# Altium PCB PCB1.PcbDoc
Units mm, origin at the board's own origin, x right, y up, seen from the top; angles counter-clockwise.
Board outline 140 x 75.1 mm, 2 copper layers (Top Layer, Bottom Layer); 104 components, 94 nets, 402 pads, 386 vias.
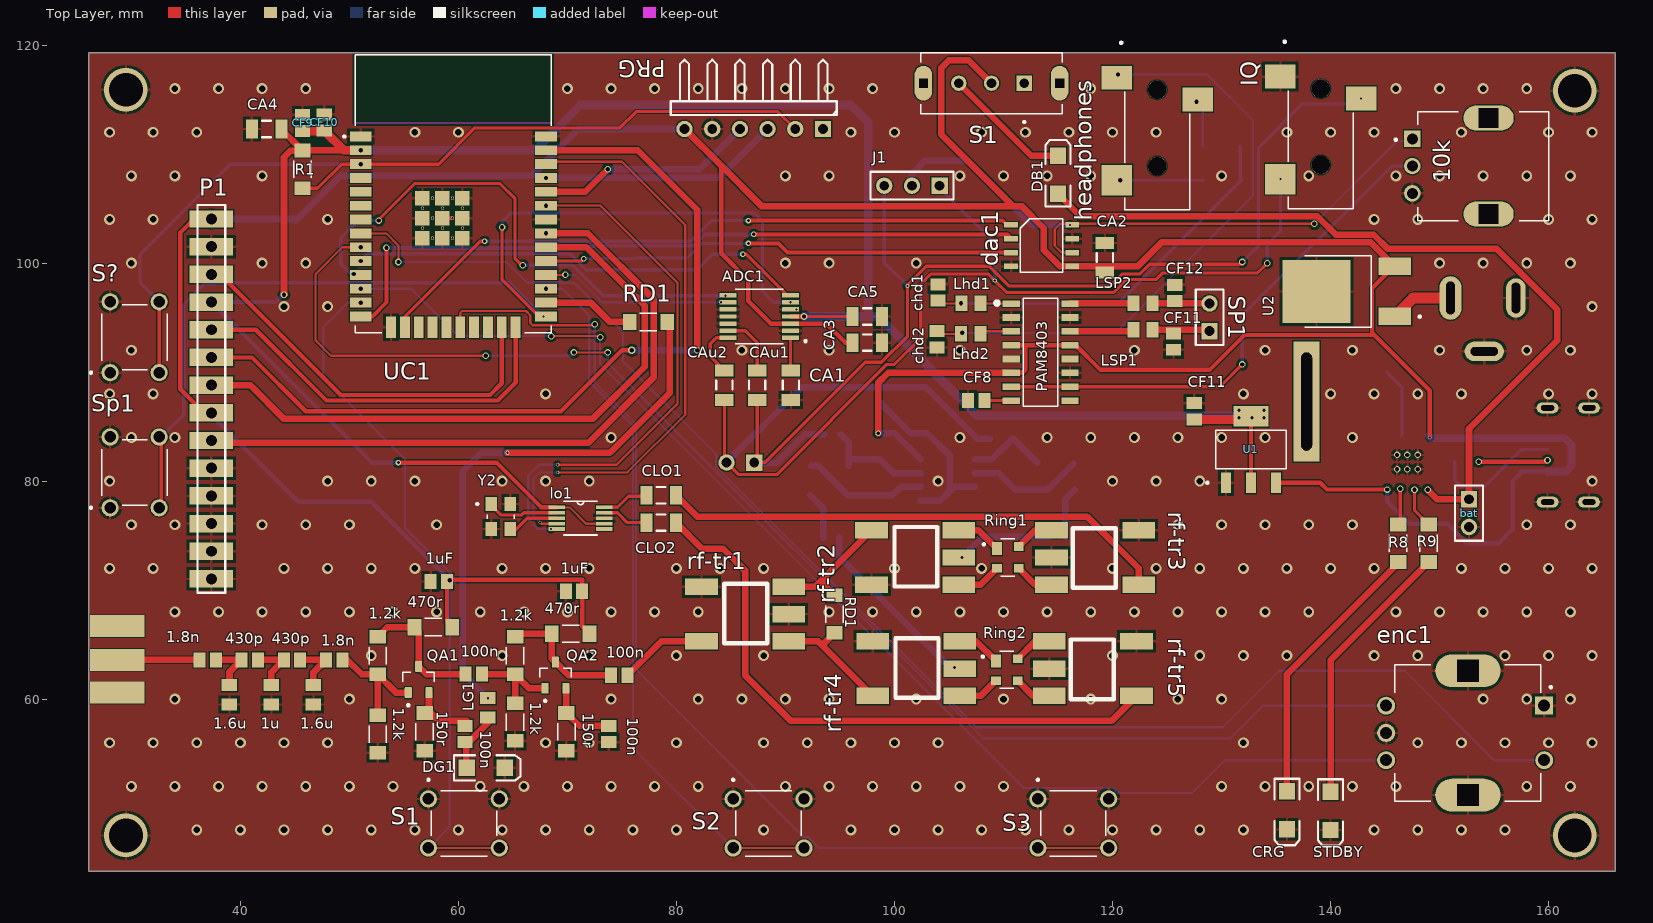
[diagram p0: Top Layer view]
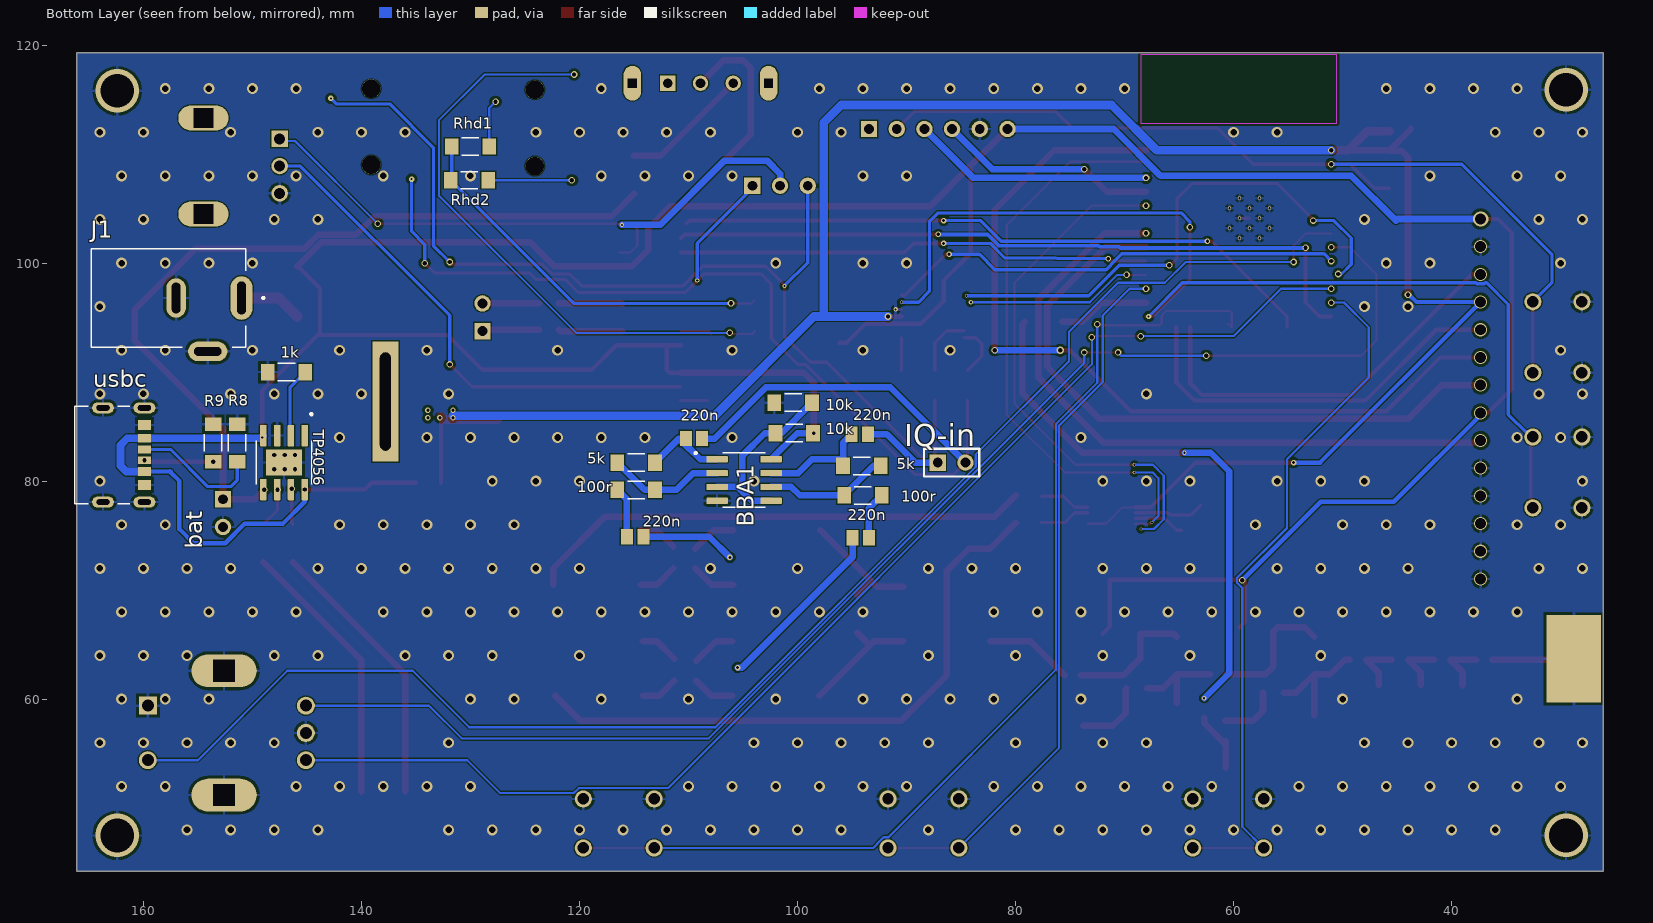
[diagram p1: Bottom Layer view, seen from below]
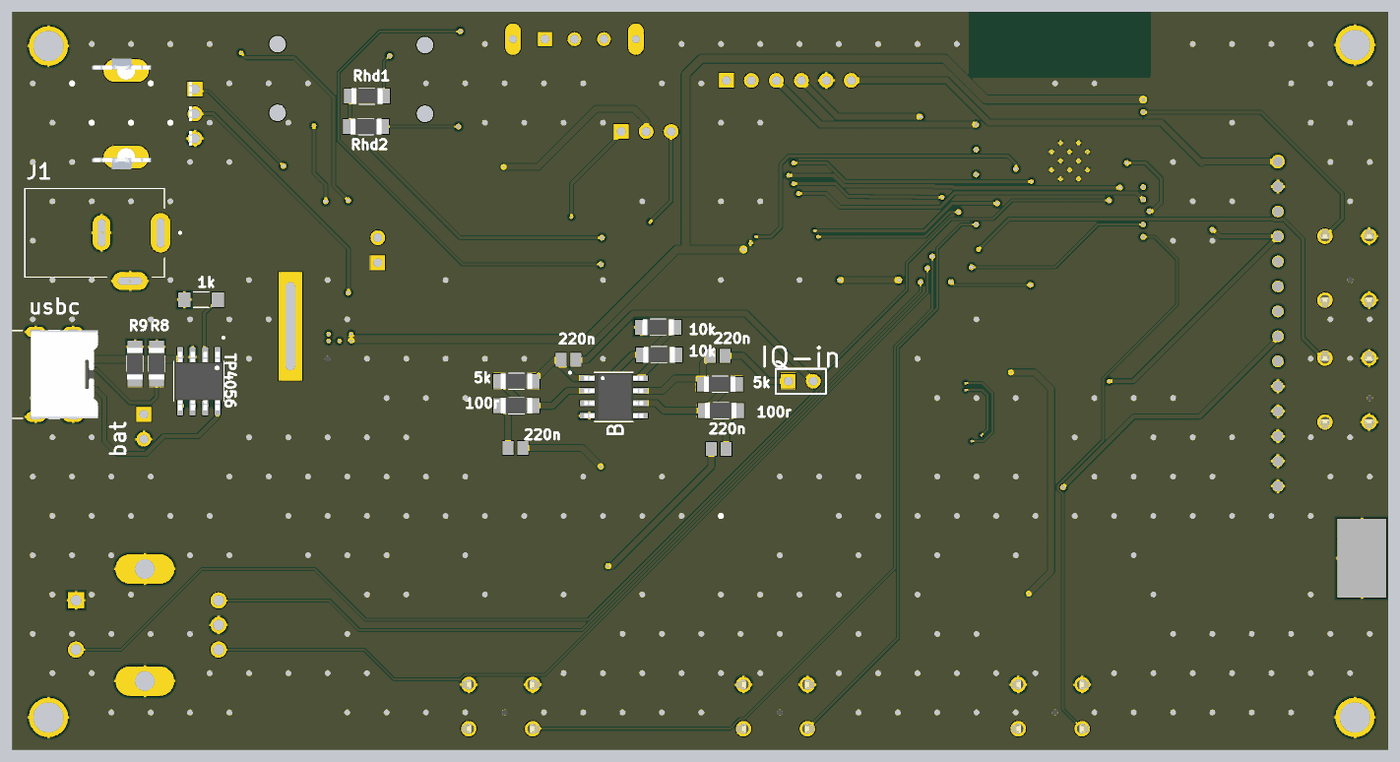
[diagram p2: 3D render of the assembled board from below, using the file's embedded part models]

## Layer stack, top to bottom
Top Solder: solder mask 0.0102, Solder Resist, Dk 3.5
Top Layer: signal copper 0.0356
Dielectric 1: dielectric 0.32, FR-4, Dk 4.8
Bottom Layer: signal copper 0.0356
Bottom Solder: solder mask 0.0102, Solder Resist, Dk 3.5

## Board outline
26.1,44.2 166.1,44.2 166.1,119.3 26.1,119.3

## Design rules (kind name [scope] priority, off if disabled: settings)
Clearance [All] p1: gap=0.1 ignorepadtopadclearanceinfootprint=TRUE except(0: Via-Hole Fill-Hole Poly-Hole Region-Hole Text-Hole; 0.254: Via-Via Via-Fill Via-Poly Via-Region Via-Text Fill-Fill Fill-Poly Fill-Region Fill-Text Poly-Poly Poly-Region Poly-Text Region-Region Region-Text Text-Text)
PolygonConnect [All] p1: connectstyle=Relief reliefconductorwidth=0.254 reliefentries=4 polygonreliefangle="90 Angle" airgapwidth=0.254
RoomDefinition front-end [InComponentClass('front-end')] p1: confinementstyle=ConfineIn formatcopy=TRUE lockcomponents=FALSE outline 25.9,44.1 166.1,44.1 166.1,119.4 25.9,119.4
RoomDefinition Sheet1 [InComponentClass('Sheet1')] p2: confinementstyle=ConfineIn formatcopy=TRUE lockcomponents=FALSE outline 26.1,44.2 165.9,44.2 165.9,119.5 26.1,119.5
RoutingVias [All] p1: holewidth=0.711 width=1.27 viastyle="Through Hole" minholewidth=0.2 minwidth=0.4 maxholewidth=0.711 maxwidth=1.27
SolderMaskExpansion [All] p1: expansion=0.102
Width [All] p1: maxlimit=3 minlimit=0.2 preferedwidth=0.7 minimp=50.000000 maximp=50.000000 favimp=50.000000
30 further rules are at their usual default settings.

## Classes and differential pairs
component class front-end: 1.2k 1.6u 1.8n 1u 1uF 5k 10k 100n 100r 150r 220n 430p 470r BBA1 CA? CBB1 CBB2 CBB3 CBB4 CF1 CF2 CF? DG1 LG1 QA1 QA2 R? RA5 RA6 RA7 RD1 rf-tr1 rf-tr2 rf-tr3 rf-tr4 rf-tr5 Ring1 Ring2
component class Sheet1: 1k 10k ADC1 bat CA1 CA2 CA3 CA4 CA5 CA8 CA9 CA10 CA11 CAu1 CAu2 CF8 CF9 CF10 CF11 CF12 chd1 chd2 CLO1 CLO2 CRG dac1 DB1 enc1 headphones IQ IQ-in J1 Lhd1 Lhd2 lo1 LSP1 LSP2 P1 PAM8403 PRG R1 R6 R8 R9 Rhd1 Rhd2 S1 S2 S3 S? SP1 Sp1 STDBY TP4056 U1 U2 UC1 usbc Y2

## Components (designator, comment, footprint, x,y, rotation, side; value= is the part's Value field where it differs from the comment)
1.2k "ERJU08J274V" RES_ERJU08J274V 65.2,64 r90 top
1.2k "ERJU08J274V" RES_ERJU08J274V 65.2,57.9 r90 top
1.2k "ERJU08J274V" RES_ERJU08J274V 52.6,56.8 r90 top
1.2k "ERJU08J274V" RES_ERJU08J274V 52.6,64 r90 top
1.6u "LQM21PN3R3MGRD" INDC2012X100N 46.7,60.4 r90 top
1.6u "LQM21PN3R3MGRD" INDC2012X100N 39,60.4 r90 top
1.8n "Cap Pol3" C0805 48.6,63.6 r0 top value=100pF
1.8n "Cap Pol3" C0805 37,63.6 r0 top value=100pF
1k "1K" RES_ERJU08J274V 146.875,90 r180 bottom
1u "LQM21PN3R3MGRD" INDC2012X100N 42.85,60.4 r90 top
1uF "Cap Pol3" C0805 70.6,69.9 r180 top value=100pF
1uF "Cap Pol3" C0805 58.2,70.8 r180 top value=100pF
5k "ERJU08J154V" RES_ERJU08J154V 94.1,81.4 r180 bottom
5k "ERJU08J154V" RES_ERJU08J154V 114.8,81.7 r180 bottom
10k "ERJU08J154V" RES_ERJU08J154V 100.4,87.2 r180 bottom
10k "ERJU08J154V" RES_ERJU08J154V 100.3,84.4 r180 bottom
10k "PT01-D120D-B104" TRIM_PT01-D120D-B104 154.5,108.9 r270 top
100n "Cap Pol3" C0805 60.6,56.8 r270 top value=100pF
100n "Cap Pol3" C0805 73.8,56.8 r270 top value=100pF
100n "Cap Pol3" C0805 74.75,62.2 r0 top value=100pF
100n "Cap Pol3" C0805 61.4,62.3 r0 top value=100pF
100r "ERJU08J154V" RES_ERJU08J154V 94,78.7 r180 bottom
100r "ERJU08J154V" RES_ERJU08J154V 114.8,79.2 r180 bottom
150r "ERJU08J274V" RES_ERJU08J274V 69.9,57 r90 top
150r "ERJU08J274V" RES_ERJU08J274V 56.9,57 r90 top
220n "Cap Pol3" C0805 109.5,83.9 r180 bottom value=100pF
220n "Cap Pol3" C0805 94.3,84.3 r180 bottom value=100pF
220n "Cap Pol3" C0805 94.2,74.8 r180 bottom value=100pF
220n "Cap Pol3" C0805 114.9,74.9 r0 bottom value=100pF
430p "Cap Pol3" C0805 44.733,63.6 r0 top value=100pF
430p "Cap Pol3" C0805 40.866,63.6 r0 top value=100pF
470r "ERJU08J274V" RES_ERJU08J274V 70.3,66 r0 top
470r "ERJU08J274V" RES_ERJU08J274V 57.7,66.6 r0 top
ADC1 "PCM1808PWRG4" SOP65P640X120-14N 87.6,95.1 r180 top
bat "Header 2" HDR1X2 152.7,78.34 r270 top
BBA1 "TL072CDT" SOIC127P600X175-8N 104.9,80.1 r180 bottom
CA1 "Cap Semi" C1206 90.5,88.8 r90 top value=100pF
CA2 "Cap Semi" C1206 119.3,100.5 r270 top value=100pF
CA3 "Cap Semi" C1206 97.5,92.7 r180 top value=100pF
CA4 "Cap Semi" C1206 42.4,112.3 r0 top value=100pF
CA5 "Cap Semi" C1206 97.5,95.1 r180 top value=100pF
CAu1 "Cap Semi" C1206 87.4,88.8 r270 top value=100pF
CAu2 "Cap Semi" C1206 84.4,88.8 r270 top value=100pF
CF8 "Cap Pol3" C0805 107.5,87.4 r180 top value=100pF
CF9 "Cap Pol3" C0805 45.7,112.85 r90 top value=100pF
CF10 "Cap Pol3" C0805 47.7,112.9 r90 top value=100pF
CF11 "Cap Pol3" C0805 127.5,86.4 r90 top value=100pF
CF11 "Cap Pol3" C0805 125.6,92.8 r270 top value=100pF
CF12 "Cap Pol3" C0805 125.7,97.25 r90 top value=100pF
chd1 "Cap Pol3" C0805 104,97.3 r90 top value=100pF
chd2 "Cap Pol3" C0805 103.9,93 r270 top value=100pF
CLO1 "Cap Semi" C1206 78.6,78.7 r0 top value=100pF
CLO2 "Cap Semi" C1206 78.6,76.2 r0 top value=100pF
CRG "LED2" 3.2X1.6X1.1 136,49.8 r270 top
dac1 "PT8211" SOP8-6.0-4.9X3.9 113.5,101.6 r270 top
DB1 "D Tunnel1" 3.2X1.6X1.1 115,108.1 r90 top
DG1 "D Tunnel1" 3.2X1.6X1.1 62.5,53.7 r0 top
enc1 "PEC11R-4215F-S0024" XDCR_PEC11R-4215F-S0024 152.6,56.9 r270 top
headphones "SJ-3523-SMT" CUI_SJ-3523-SMT 124.1,115.9 r270 top
IQ "SJ-3523-SMT" CUI_SJ-3523-SMT 139.1,116 r270 top
IQ-in "Header 2" HDR1X2 87.14,81.7 r180 bottom
J1 "Header 3" HDR1X3 104.14,107.1 r180 top
J1 "PJ-050AH" CUI_PJ-050AH 151,96.8 r0 bottom
LG1 "LQM21PN3R3MGRD" INDC2012X100N 62.7,59.2 r90 top
Lhd1 "LQM21PN3R3MGRD" INDC2012X100N 107.015,96.3 r180 top
Lhd2 "LQM21PN3R3MGRD" INDC2012X100N 107,93.5 r180 top
lo1 "SI5351A-B-GT" SOP50P490X110-10N 71.2,76.6 r0 top
LSP1 "LQM21PN3R3MGRD" INDC2012X100N 122.8,93.9 r0 top
LSP2 "LQM21PN3R3MGRD" INDC2012X100N 122.8,96.3 r0 top
P1 "Header 14" HDR1X14 37.338,104.045 r270 top
PAM8403 "PAM8403DR" SOIC127P605X150-16N 113.4,91.835 r0 top
PRG "Header 6H" HDR1X6H 93.44,112.3 r180 top
QA1 "MMBT3904" TRANS_MMBT3904 56.35,61.8 r90 top
QA2 "MMBT3904" TRANS_MMBT3904 68.9,62.2 r90 top
R1 "ERJU08J274V" RES_ERJU08J274V 45.7,108.6 r90 top
R8 "1k" RES_ERJU08J274V 146.2,74.3 r90 top
R8 "ERJU08J154V" RES_ERJU08J154V 151.4,83.5 r270 bottom
R9 "1k" RES_ERJU08J274V 149,74.3 r90 top
R9 "ERJU08J154V" RES_ERJU08J154V 153.6,83.5 r270 bottom
RD1 "ERJU08J154V" RES_ERJU08J154V 77.425,94.6 r180 top
RD1 "ERJU08J154V" RES_ERJU08J154V 94.5,67.8 r270 top
rf-tr1 "Component_1" RF-transformer 86.3,67.8 r270 top
rf-tr2 "Component_1" RF-transformer 101.9,73 r270 top
rf-tr3 "Component_1" RF-transformer 118.4,73 r90 top
rf-tr4 "Component_1" RF-transformer 102,62.8 r270 top
rf-tr5 "Component_1" RF-transformer 118.2,62.8 r90 top
Rhd1 "ERJU08J154V" RES_ERJU08J154V 130,110.7 r180 bottom
Rhd2 "ERJU08J154V" RES_ERJU08J154V 130.1,107.6 r180 bottom
Ring1 "Component_1" TRANS_BFP183E7764HTSA1 110.4,73 r0 top
Ring2 "Component_1" TRANS_BFP183E7764HTSA1 110.3,62.7 r0 top
S1 "FSM8JH" SW_FSM8JH 60.5,48.6 r90 top
S1 "EG1247" SW_EG1206 108.9,116.5 r180 top
S2 "FSM8JH" SW_FSM8JH 88.45,48.6 r90 top
S3 "FSM8JH" SW_FSM8JH 116.4,48.6 r90 top
S? "FSM8JH" SW_FSM8JH 30.3,93.2 r180 top
SP1 "Header 2" HDR1X2 128.9,93.76 r90 top
Sp1 "boot" SW_FSM8JH 30.3,80.8 r180 top
STDBY "LED2" 3.2X1.6X1.1 140,49.75 r270 top
TP4056 "TP4056" SOP127P600X175-9N 147.1,81.7 r270 bottom
U1 "AP2111H-3.3TRG1" SOT230P700X180-4N 132.7,82.9 r0 top
U2 "MC78M05ABDTG" VREG_MC78M05ABDTG 141.5,97.4 r180 top
UC1 "ESP32-WROOM-32" MODULE_ESP32-WROOM-32 59.535,106.357 r0 top
usbc "UJC-HP-3-SMT-TR" CUI_UJC-HP-3-SMT-TR 159.905,82.4 r270 bottom
Y2 "ABM8-25.000MHZ-10-D1G-T" XTAL_ABM8-25.000MHZ-10-D1G-T 63.875,76.75 r0 top

## Footprints (in the part's own frame and the unit in brackets; to place one, negate y for a bottom-side part, rotate by r counter-clockwise, add the part's x,y. Pads: shape width x height; smd on the part's side, far side on the other; paste and mask are expansions set on the pad)
3.2X1.6X1.1 [mm] "SMT LED; 2 Flat Leads"
  rect 1.5x1.5 smd: 1(-1.75,0) 2(1.75,0)
  silkscreen extent -2.9,-1.15 3.2,1.15
C0805 [mm] "Chip Capacitor, Body 2.0x1.3mm, IPC High Density"
  rect 1.1x1.4 smd: 1(-0.75,0) 2(0.75,0)
  body extent -1.1,-0.72 1.1,0.72, height 1.4
C1206 [mm] "Chip Capacitor, Body 3.2x1.6mm, IPC High Density"
  rect 1.1x1.7 smd: 1(-1.35,0) 2(1.35,0)
  silkscreen extent -0.4,-0.75 0.4,0.75, body extent -1.7,-0.9 1.7,0.9, height 1.3
CUI_PJ-050AH [mm]
  oval 2x4 hole 0.8 slot 3 at 90 deg: 1(0,0)
  oval 1.8x3.6 hole 0.8 slot 2.8 at 90 deg: 2(6,0)
  oval 3.6x1.8 hole 0.8 slot 2.5 at 0 deg: 3(3.1,4.9)
  silkscreen extent -2.1,-4.5 13.8,4.5, body extent -2.2,-4.56 13.86,4.56, height 11.2
CUI_SJ-3523-SMT [mm]
  rect 2.2x2.8 smd: 1(-1.1,-3.7) 3(0.9,3.7)
  rect 2.8x2.8 smd: 2(8.3,-3.7)
  round 1.7 hole 1.7 unplated: ""(0,0) ""(7,0)
  silkscreen extent -4.4,-3.4 11,3
CUI_UJC-HP-3-SMT-TR [mm]
  rect 0.7x1.15 smd: A5(-0.5,0.005) B5(0.5,0.005)
  rect 0.8x1.15 smd: A9(1.52,0.005) B9(-1.52,0.005)
  rect 0.9x1.15 smd: A12(2.75,0.005) B12(-2.75,0.005)
  oval 1x2 hole 0.5 slot 1.2 at 90 deg: S1(-4.32,0) S2(4.32,0) S3(-4.32,-3.8) S4(4.32,-3.8)
  silkscreen extent -4.47,-6.4 4.47,-1.35, body extent -4.47,-4.28 4.47,2.62, height 1.93
HDR1X2 [mm] "Connector; Header; 2 Position"
  rect 1.5x1.5 hole 0.9: 1(0,0)
  round 1.5 hole 0.9: 2(2.54,0)
  silkscreen extent -1.27,-1.27 3.81,1.27
HDR1X3 [mm] "Connector; Header; 3 Position"
  rect 1.5x1.5 hole 0.9: 1(0,0)
  round 1.5 hole 0.9: 2(2.54,0) 3(5.08,0)
  silkscreen extent -1.27,-1.27 6.35,1.27
HDR1X6H [mm] "Connector; Header; 6 Position; Right Angle"
  rect 1.5x1.5 hole 0.9: 1(0,0)
  round 1.5 hole 0.9: 2(2.54,0) 3(5.08,0) 4(7.62,0) 5(10.16,0) 6(12.7,0)
  silkscreen extent -1.27,-6.35 13.97,-1.27
HDR1X14 [mm] "Connector; Header; 14 Position"
  rect 1.6x4 smd: 1(0,0) 2(2.54,0) 3(5.08,0) 4(7.62,0) 5(10.16,0) 6(12.7,0) 7(15.24,0) 8(17.78,0) 9(20.32,0) 10(22.86,0) 11(25.4,0) 12(27.94,0) 13(30.48,0) 14(33.02,0)
  silkscreen extent -1.27,-1.27 34.29,1.27
INDC2012X100N [mm]
  rect 1.1x1.42 smd: 1(-0.885,0) 2(0.885,0)
MODULE_ESP32-WROOM-32 [mm]
  rect 2x0.9 smd: 1(-8.5,5.26) 2(-8.5,3.99) 3(-8.5,2.72) 4(-8.5,1.45) 5(-8.5,0.18) 6(-8.5,-1.09) 7(-8.5,-2.36) 8(-8.5,-3.63) 9(-8.5,-4.9) 10(-8.5,-6.17) 11(-8.5,-7.44) 12(-8.5,-8.71) 13(-8.5,-9.98) 14(-8.5,-11.25) 25(8.5,-11.25) 26(8.5,-9.98) 27(8.5,-8.71) 28(8.5,-7.44) 29(8.5,-6.17) 30(8.5,-4.9) 31(8.5,-3.63) 32(8.5,-2.36) 33(8.5,-1.09) 34(8.5,0.18) 35(8.5,1.45) 36(8.5,2.72) 37(8.5,3.99) 38(8.5,5.26)
  rect 0.9x2 smd: 15(-5.715,-12.25) 16(-4.445,-12.25) 17(-3.175,-12.25) 18(-1.905,-12.25) 19(-0.635,-12.25) 20(0.635,-12.25) 21(1.905,-12.25) 22(3.175,-12.25) 23(4.445,-12.25) 24(5.715,-12.25)
  rect 1.33x1.33 smd: 39_1(-2.835,-0.405) 39_2(-1,-0.405) 39_3(0.835,-0.405) 39_4(-2.835,-2.24) 39_5(-1,-2.24) 39_6(0.835,-2.24) 39_7(-2.835,-4.075) 39_8(-1,-4.075) 39_9(0.835,-4.075)
  round 0.3 hole 0.2: 39_10(-1.917,-0.405) 39_11(-0.082,-0.405) 39_12(-2.835,-1.322) 39_13(-1,-1.322) 39_14(0.835,-1.322) 39_15(-1.917,-2.24) 39_16(-0.082,-2.24) 39_17(-2.835,-3.157) 39_18(-1,-3.157) 39_19(0.835,-3.157) 39_20(-1.917,-4.075) 39_21(-0.082,-4.075)
  Keep-Out Layer region: 9,6.45 -9,6.45 -9,12.75 9,12.75
  Keep-Out Layer region: 9,6.45 -9,6.45 -9,12.75 9,12.75
  silkscreen extent -10.1,-12.75 9,12.75, body extent -9.75,-13.5 9.75,13, height 3.2
RES_ERJU08J154V [mm]
  rect 1.25x1.5 smd: 1(-1.725,0) 2(1.725,0)
  silkscreen extent -0.78,-0.8 0.78,0.8, body extent -1.6,-0.8 1.6,0.8, height 0.6
RES_ERJU08J274V [mm]
  rect 1.25x1.5 smd: 1(-1.725,0) 2(1.725,0)
  silkscreen extent -0.78,-0.8 0.78,0.8
RF-transformer [mm] "RF-transformer SMD"
  rect 1.5x3 smd: 1(-2.5,4) 2(0,4) 3(2.5,4) 4(2.5,-4) 5(-2.5,-4)
  silkscreen extent -2.79,-1.91 2.67,2.03
SOIC127P600X175-8N [mm]
  rrect25% 1.97x0.57 smd: 1(-2.475,1.905) 2(-2.475,0.635) 3(-2.475,-0.635) 4(-2.475,-1.905) 5(2.475,-1.905) 6(2.475,-0.635) 7(2.475,0.635) 8(2.475,1.905)
  silkscreen extent -4.54,-2.51 1.95,2.57, body extent -3,-2.45 3,2.45, height 1.75
SOIC127P605X150-16N [mm]
  rect 1.6x0.6 smd: 1(-2.7,4.445) 2(-2.7,3.175) 3(-2.7,1.905) 4(-2.7,0.635) 5(-2.7,-0.635) 6(-2.7,-1.905) 7(-2.7,-3.175) 8(-2.7,-4.445) 9(2.7,-4.445) 10(2.7,-3.175) 11(2.7,-1.905) 12(2.7,-0.635) 13(2.7,0.635) 14(2.7,1.905) 15(2.7,3.175) 16(2.7,4.445)
  silkscreen extent -4.14,-4.95 1.58,4.95
SOP8-6.0-4.9X3.9 [mm]
  rect 0.5x1.27 smd: 1(-1.905,-2.8) 2(-0.635,-2.8) 3(0.635,-2.8) 4(1.905,-2.8) 5(1.905,2.8) 6(0.635,2.8) 7(-0.635,2.8) 8(-1.905,2.8)
  silkscreen extent -2.45,-1.95 2.45,1.95
SOP50P490X110-10N [mil]
  rect 59x13 smd: 1(-86,39) 2(-86,20) 3(-86,0) 4(-86,-20) 5(-86,-39) 6(86,-39) 7(86,-20) 8(86,0) 9(86,20) 10(86,39)
  silkscreen extent -61,-61 61,61, body extent -96,-59 96,59, height 43
SOP65P640X120-14N [mm]
  rrect25% 1.57x0.41 smd: 1(-2.87,1.95) 2(-2.87,1.3) 3(-2.87,0.65) 4(-2.87,0) 5(-2.87,-0.65) 6(-2.87,-1.3) 7(-2.87,-1.95) 8(2.87,-1.95) 9(2.87,-1.3) 10(2.87,-0.65) 11(2.87,0) 12(2.87,0.65) 13(2.87,1.3) 14(2.87,1.95)
  silkscreen extent -4.34,-2.5 2.2,2.5, body extent -3.2,-2.5 3.2,2.5, height 1.2
SOP127P600X175-9N [mm]
  rrect25% 1.97x0.6 smd: 1(-2.475,1.905) 2(-2.475,0.635) 3(-2.475,-0.635) 4(-2.475,-1.905) 5(2.475,-1.905) 6(2.475,-0.635) 7(2.475,0.635) 8(2.475,1.905)
  rect 2.413x3.302 smd paste-3: 9(0,0)
  silkscreen extent -4.54,-2.55 2,2.6, body extent -3,-2.45 3,2.45, height 1.75
SOT230P700X180-4N [mm]
  rect 0.9x1.91 smd: 1(-2.3,-3.05) 2(0,-3.05) 3(2.3,-3.05)
  rect 3.19x1.91 smd: 4(0,3.05)
  silkscreen extent -4.1,-3.15 3.25,1.75, body extent -3.5,-3.25 3.5,3.25, height 1.65
SW_EG1206 [mm]
  rect 1.408x1.408 / inner round 1.408 / far side rect 1.408x1.408 hole 0.9: 1(-3,0)
  round 1.408 hole 0.9: 2(0,0) 3(3,0)
  oval 1.6x3.2 hole 0.8 square: SH1(-6.25,0) SH2(6.25,0)
  silkscreen extent -6.5,-2.8 6.5,3.66
SW_FSM8JH [mm]
  round 1.575 hole 1.05: 1(2.25,3.25) 2(2.25,-3.25) 3(-2.25,3.25) 4(-2.25,-3.25)
  silkscreen extent -3,-3 4.1,3.35, body extent -3,-3.95 3,3.95, height 9.5
TRANS_BFP183E7764HTSA1 [mm]
  rect 0.9x1.2 smd: 1(-1,0.8)
  rect 0.9x0.8 smd: 2(-1,-1) 3(1,-1) 4(1,1)
  silkscreen extent -2.3,-1.71 0.65,1.71, body extent -1.2,-1.45 1.2,1.45, height 1.1
TRANS_MMBT3904 [mm]
  rrect25% 1x0.65 smd: 1(-1.2,0.95) 2(-1.2,-0.95) 3(1.2,0)
  silkscreen extent -2.46,-1.45 0.65,1.45, body extent -1.2,-1.45 1.2,1.45, height 1.2
TRIM_PT01-D120D-B104 [mm]
  rect 1.508x1.508 / inner round 1.508 / far side rect 1.508x1.508 hole 1: 1(-2.5,-7)
  round 1.508 hole 1: 2(0,-7) 3(2.5,-7)
  oval 2.3x4.6 hole 1.8 square: S1(-4.4,0) S2(4.4,0)
  silkscreen extent -5,-8.61 5,5.5, body extent -5.64,-6.7 5.63,5.95, height 18.6
VREG_MC78M05ABDTG [mm]
  rect 3x1.6 smd: 1(-4.39,2.29) 3(-4.39,-2.29)
  rect 6.2x5.8 smd paste-4: 2_4(2.79,0)
  silkscreen extent -6.78,-3.27 3.87,3.27
XDCR_PEC11R-4215F-S0024 [mm]
  rect 1.65x1.65 hole 1.1: 1(-2.5,7)
  round 1.65 hole 1.1: 2(2.5,7) A(-2.5,-7.5) B(2.5,-7.5) COM(0,-7.5)
  oval 3x6 hole 2 square: S1(-5.7,0) S2(5.7,0)
  silkscreen extent -6.25,-6.7 6.25,7.7
XTAL_ABM8-25.000MHZ-10-D1G-T [mm]
  rect 1.05x1.3 smd: 1(-0.875,1.15) 2(-0.875,-1.15) 3(0.875,-1.15) 4(0.875,1.15)
  silkscreen extent -2.25,-0.18 1.25,1.25, body extent -1.25,-1.6 1.25,1.6, height 0.8

## Part data
1.2k 1.2k 1.2k 1.2k 150r 150r 470r 470r R1 U2 usbc: Package=None, Availability=Unavailable, Price=None
  1.2k 1.2k 1.2k 1.2k 150r 150r 470r 470r R1: MP=ERJU08J274V
  U2: MF="{'manufacturer': u'onsemi'}", MP=MC78M05ABDTG
  usbc: MP=UJC-HP-3-SMT-TR
1.6u 1.6u 1u LG1 Lhd1 Lhd2 LSP1 LSP2: "0805 Multillayer Type (Ferrite Core) for Power lines", Package=None, Availability=Unavailable, MP=LQM21PN3R3MGRD, Price=None
1.8n 1.8n 1uF 1uF 100n 100n 100n 100n 220n 220n 220n 220n 430p 430p CF8 CF9 CF10 CF11 CF11 CF12 chd1 chd2: "Polarized Capacitor (Surface Mount)", LatestRevisionDate=29-May-2009, LatestRevisionNote="IPC-7351 Footprint Added.", PackageDescription="Chip Capacitor", PackageReference=C0805, Published=8-Jun-2000, Publisher="Altium Limited"
1k R8 R9: library part ERJU08J274V, Package=None, Availability=Unavailable, MP=ERJU08J274V, Price=None
5k 5k 10k 10k 100r 100r R8 R9 RD1 RD1 Rhd1 Rhd2: "1206 anti-sulfurated resistor 1206 Anti-Sulfurated", Package="3216-2 Panasonic", Check_prices=https://www.snapeda.com/parts/ERJ-U08J154V/Panasonic/view-part/?ref=eda, MF=Panasonic, MP=ERJ-U08J154V, SnapEDA_Link=https://www.snapeda.com/parts/ERJ-U08J154V/Panasonic/view-part/?ref=snap
10k: "10 mm, Vertical, Linear, 100 kΩ, Through Hole, D-cut Rotary Potentiometer", Package=None, Check_prices=https://www.snapeda.com/parts/PT01-D120D-B104/Same+Sky/view-part/?ref=eda, MF="Same Sky", MP=PT01-D120D-B104, SnapEDA_Link=https://www.snapeda.com/parts/PT01-D120D-B104/Same+Sky/view-part/?ref=snap
ADC1: "99dB SNR Stereo ADC With Single-Ended Inputs 14-TSSOP -40 to 85", Package="TSSOP-14 Texas Instruments", Check_prices=https://www.snapeda.com/parts/PCM1808PWRG4/Texas+Instruments/view-part/?ref=eda, MF="Texas Instruments", MP=PCM1808PWRG4, SnapEDA_Link=https://www.snapeda.com/parts/PCM1808PWRG4/Texas+Instruments/view-part/?ref=snap
bat IQ-in SP1: "Header, 2-Pin", LatestRevisionDate=17-Jul-2002, LatestRevisionNote="Re-released for DXP Platform.", Publisher="Altium Limited"
BBA1: "Dual Low-Noise JFET-Input General-Purpose Operational Amplifier 8-SOIC 0 to 70", Package="SOIC-8 Texas Instruments", Check_prices=https://www.snapeda.com/parts/TL072CD/STMicroelectronics/view-part/?ref=eda, MF=STMicroelectronics, MP=TL072CD, SnapEDA_Link=https://www.snapeda.com/parts/TL072CD/STMicroelectronics/view-part/?ref=snap
CA1 CA2 CA3 CA4 CA5 CAu1 CAu2 CLO1 CLO2: "Capacitor (Semiconductor SIM Model)", LatestRevisionDate=29-May-2009, LatestRevisionNote="IPC-7351 Footprint Added.", PackageDescription="Chip Capacitor", PackageReference=C1206, Published=8-Jun-2000, Publisher="Altium Limited"
CRG STDBY: "Typical RED, GREEN, YELLOW, AMBER GaAs LED", LatestRevisionDate=17-Jul-2002, LatestRevisionNote="Re-released for DXP Platform.", PackageDescription="SM LED; 2 Flat Leads", PackageReference=3.2X1.6X1.1, PackageVersion=Feb-2002, Published=8-Jun-2000, Publisher="Altium Limited"
dac1: "8 Pin, DIP, 300mil", Package=Package, Check_prices=https://www.snapeda.com/parts/PT8211/Princeton+Technology/view-part/?ref=eda, MF="Princeton Technology", MP=PT8211, SnapEDA_Link=https://www.snapeda.com/parts/PT8211/Princeton+Technology/view-part/?ref=snap
DB1 DG1: "Tunnel Diode - RLC Model", LatestRevisionDate=17-Jul-2002, LatestRevisionNote="Re-released for DXP Platform.", PackageDescription="SM LED; 2 Flat Leads", PackageReference=3.2X1.6X1.1, PackageVersion=Feb-2002, Published=8-Jun-2000, Publisher="Altium Limited"
enc1: "Incremental Encoder, 12 Mm, Contact Rating 10 Ma - 5 Vdc", Package=None, Availability=Unavailable, MP=PEC11R-4215F-S0024, Price=None
headphones IQ: "3.50mm (0.141, 1/8, Mini Plug) - Headphone Phone Jack Stereo (3 Conductor, TRS) Connector Solder", Package=None, Check_prices=https://www.snapeda.com/parts/SJ-3523-SMT/Same+Sky/view-part/?ref=eda, MF="Same Sky", MP=SJ-3523-SMT, SnapEDA_Link=https://www.snapeda.com/parts/SJ-3523-SMT/Same+Sky/view-part/?ref=snap
J1: "Header, 3-Pin", LatestRevisionDate=17-Jul-2002, LatestRevisionNote="Re-released for DXP Platform.", Publisher="Altium Limited"
J1: "2.0 x 6.0 mm, 5.0 A, Horizontal, Through Hole, Pick-n-Place Top, Dc Power Jack Connector", Package=None, Check_prices=https://www.snapeda.com/parts/PJ-050AH/Same+Sky/view-part/?ref=eda, MF="Same Sky", MP=PJ-050AH, SnapEDA_Link=https://www.snapeda.com/parts/PJ-050AH/Same+Sky/view-part/?ref=snap
lo1: "I2C Prog, Any Frequency, Any Output, Xtal Ref, 3-Output LVCMOS Clock Gen", Package=None, Check_prices=https://www.snapeda.com/parts/SI5351ABGT/Skyworks+Solutions/view-part/?ref=eda, MF="Skyworks Solutions", MP=SI5351ABGT, SnapEDA_Link=https://www.snapeda.com/parts/SI5351ABGT/Skyworks+Solutions/view-part/?ref=snap
P1: "Header, 14-Pin", LatestRevisionDate=17-Jul-2002, LatestRevisionNote="Re-released for DXP Platform.", Publisher="Altium Limited"
PAM8403: "Amplifier IC 2-Channel _Stereo_ Class D 16-SOP", Package="SOP-16 Diodes Inc.", Availability=Unavailable, MF="Diodes Inc.", MP=PAM8403DR, Price=None, SnapEDA_Link=https://www.snapeda.com/parts/PAM8403DR/Diodes%20Inc./view-part/108087/?ref=snap
PRG: "Header, 6-Pin, Right Angle", LatestRevisionDate=17-Jul-2002, LatestRevisionNote="Re-released for DXP Platform.", Publisher="Altium Limited"
QA1 QA2: "BJT, SOT-23, 40V, 200mA, NPN, 0.35W, 150°C", Package="SOT-23 Diotec", Check_prices=https://www.snapeda.com/parts/MMBT3904/Diotec/view-part/?ref=eda, MF="Diotec Semiconductor", MP=MMBT3904, SnapEDA_Link=https://www.snapeda.com/parts/MMBT3904/Diotec/view-part/?ref=snap
rf-tr1 rf-tr2 rf-tr3 rf-tr4 rf-tr5: "RF-transformer"
S1 S2 S3 S?: "Switch,Pushbutton,Tactile,SPST,Thru Hole,Vertical,6MM,Black", Package=None, Check_prices=https://www.snapeda.com/parts/FSM8JH/TE+Connectivity+ALCOSWITCH+Switches/view-part/?ref=eda, MF="TE Connectivity", MP=FSM8JH, SnapEDA_Link=https://www.snapeda.com/parts/FSM8JH/TE+Connectivity+ALCOSWITCH+Switches/view-part/?ref=snap
S1: "Slide Switch SPDT Through Hole, Right Angle", Package=None, Availability="In Stock", Check_prices=https://www.snapeda.com/parts/EG1247/E-Switch/view-part/?ref=eda, MF=E-Switch, MP=EG1247, Price=None, Purchase-URL=https://pricing.snapeda.com/search/part/EG1247/?ref=eda, SnapEDA_Link=https://www.snapeda.com/parts/EG1247/E-Switch/view-part/?ref=snap
Sp1: library part FSM8JH, "Switch,Pushbutton,Tactile,SPST,Thru Hole,Vertical,6MM,Black", Package=None, Check_prices=https://www.snapeda.com/parts/FSM8JH/TE+Connectivity+ALCOSWITCH+Switches/view-part/?ref=eda, MF="TE Connectivity", MP=FSM8JH, SnapEDA_Link=https://www.snapeda.com/parts/FSM8JH/TE+Connectivity+ALCOSWITCH+Switches/view-part/?ref=snap
TP4056: "Complete single cell Li-Ion battery with a constant current / constant voltage linear charger", Package=Package, Availability="Not in stock", Check_prices=https://www.snapeda.com/parts/TP4056/NanJing+Top+Power+ASIC+Corp./view-part/?ref=eda, MF="NanJing Top Power ASIC Corp.", MP=TP4056, Price=None, SnapEDA_Link=https://www.snapeda.com/parts/TP4056/NanJing+Top+Power+ASIC+Corp./view-part/?ref=snap
U1: "Voltage Regulators, LDO, 600mA CMOS LDO 50mA 3.3V 250mV", Package="SOT-223 Diodes Inc.", Check_prices=https://www.snapeda.com/parts/AP2111H-3.3TRG1/Diodes+Inc./view-part/?ref=eda, MF="Diodes Inc.", MP=AP2111H-3.3TRG1, SnapEDA_Link=https://www.snapeda.com/parts/AP2111H-3.3TRG1/Diodes+Inc./view-part/?ref=snap
UC1: "Bluetooth, WiFi 802.11b/g/n, Bluetooth v4.2 +EDR, Class 1, 2 and 3 Transceiver Module 2.4GHz ~ 2.5GHz Antenna Not Included, U.FL Surface Mount", Package="Module Espressif Systems", Availability="In Stock", Check_prices=https://www.snapeda.com/parts/ESP32-WROOM-32/Espressif+Systems/view-part/?ref=eda, MF="Espressif Systems", MP=ESP32-WROOM-32, Price=None, Purchase-URL=https://pricing.snapeda.com/search/part/ESP32-WROOM-32/?ref=eda, SnapEDA_Link=https://www.snapeda.com/parts/ESP32-WROOM-32/Espressif+Systems/view-part/?ref=snap
Y2: "25 MHz ±10ppm Crystal 10pF 50 Ohms 4-SMD, No Lead", Package="NON-STANDARD-4 ABRACON", Check_prices=https://www.snapeda.com/parts/ABM8-25.000MHZ-10-D1G-T/Abracon/view-part/?ref=eda, MF="Abracon LLC", MP=ABM8-25.000MHZ-10-D1G-T, SnapEDA_Link=https://www.snapeda.com/parts/ABM8-25.000MHZ-10-D1G-T/Abracon/view-part/?ref=snap

## Free pads (board coordinates)
  rect 2.4x11 hole 1 slot 9 at 90 deg: 2(137.8,87.3)
  rect 5x2 smd: 3(28.7,63.6) 4(28.7,66.7) 5(28.7,60.6)
  rect 5x8 smd far side: 6(28.8,63.7)

## Via types
v1: diameter 1, hole 0.6, Top Layer to Bottom Layer, tented both sides, 284 vias
v2: diameter 0.6, hole 0.4, Top Layer to Bottom Layer, 51 vias
v3: diameter 0.5, hole 0.3, Top Layer to Bottom Layer, 15 vias
v4: diameter 1.2, hole 1, Top Layer to Bottom Layer, 13 vias
v5: diameter 0.4, hole 0.2, Top Layer to Bottom Layer, 7 vias
v6: diameter 0.3, hole 0.2, Top Layer to Bottom Layer, 7 vias
v7: diameter 4, hole 3.1, Top Layer to Bottom Layer, 4 vias
v8: diameter 0.5, hole 0.2, Top Layer to Bottom Layer, 3 vias
v9: diameter 0.7, hole 0.4, Top Layer to Bottom Layer, 1 vias
v10: diameter 1.4, hole 1, Top Layer to Bottom Layer, 1 vias

## Nets (pads, with @x,y where several pads share a name; then routed paths per layer and width w, separated by ;. In a path a pad name is that pad's centre, name@x,y a point inside that pad or via, vN(x,y) a via of type N, cw(c..) or ccw(c..) an arc to the next point about the centre after c; other vN are vias at no path point)
3.3V: ADC1.4 CA4.2 CA5.2 CF9.1 CF10.1 CF11.1@127.5,85.65 lo1.1 lo1.7 P1.4 R1.2 U1.2 U1.4 UC1.2 | length 206
  Top Layer w0.2: lo1.1 70.209,77.591 71.708,76.092 lo1.7
  Top Layer w0.3: v2(91.7,95.1) CA5.2
  Top Layer w0.4: v3(54.5,81.7) 63.5,81.7 67.609,77.591 lo1.1 ; U1.2 U1.4@132.7,85.8
  Top Layer w0.45: ADC1.4 v2(91.7,95.1)
  Top Layer w0.6: CA4.2 43.75,112.275 R1.2 ; v2(44,97.1) 44,109.7 44.625,110.325 R1.2 ; 49.503,110.347 45.722,110.347 R1.2
  Top Layer w0.8: CF9.1 47.65,112.1 CF10.1 49.503,110.347 v2(51.035,110.347) ; CF11.1@127.5,85.65 132.4,85.65 U1.4
  Bottom Layer w0.4: v2(44,97.1) 43.9,97.1 43.225,96.425 v4(37.338,96.425) 52.063,81.7 v3(54.5,81.7)
  Bottom Layer w0.8: v2(51.035,110.347) 67.047,110.347 71.2,114.5 96,114.5 97.6,112.9 97.6,95.1 ; v2(91.7,95.1) 97.6,95.1 ; v3@131.6,86 107.6,86 98.5,95.1 97.6,95.1
  other v3: 131.6,85.8 132.8,85.8 133.9,85.8 131.6,86.5 133.9,86.5
5v: 1uF.1 10k.2@98.575,84.4 470r.2 ADC1.3 BBA1.8 CA2.2 CA3.2 dac1.5 P1.1 P1.8 PAM8403.4 PAM8403.6 PAM8403.13 PRG.6 S1.2@108.9,116.5 TP4056.4 TP4056.8 U1.3 U2.3 usbc.A9 usbc.B9 | length 369
  Top Layer w0.4: v4(37.338,86.265) 36.654,86.265 34.5,88.419 34.5,102.8 35.745,104.045 v10(37.338,104.045) ; 470r.2@59.425,66.6 58.95,67.075 58.95,70.8 59.1,70.95 71.35,70.95 71.35,69.9 71.35,66.675 470r.2@72.025,66 ; 84.1,108.94 84.1,100.9 86.6,98.4 86.6,96.5 88.65,94.45 ADC1.3 93.75,94.45 95.5,92.7 CA3.2 ; PAM8403.6 111.73,89.93 112,90.2 112,92.47 ; PAM8403.4 112,92.47 ; U1.3 139.05,79.85 139.675,79.225 v2(145.195,79.225) ; U2.3 145.79,99.69 143.8,97.7 143.8,93.6 144,93.4 ; v6(149.1,84) 149.1,88.3 144,93.4 ; 112,92.47 PAM8403.13 116.63,92.47 118.9,90.2 128.9,90.2 132.1,93.4 144,93.4
  Top Layer w0.6: PRG.6 84.1,108.94 87.84,105.2 110.9,105.2 ; v3(98.5,84.4) 98.5,89 99.43,89.93 PAM8403.6 ; S1.2@108.9,116.5 106.8,118.6 105,118.6 104.3,117.9 104.3,111.8 110.9,105.2 ; U2.3 143.68,101.9 124.5,101.9 122.295,99.695 dac1.5 115.205,99.695 113.7,101.2 113.7,103.2 111.7,105.2 110.9,105.2
  Bottom Layer w0.4: v4@37.2,86.2 45.3,78.1 52,78.1 v2(59.2,70.9) ; v2(145.195,79.225) 145.195,78.105 147.2,76.1 150.7,76.1 152.5,74.3 155.4,74.3 156.7,75.6 156.7,80 157.58,80.88 ; 157.5,80.88 157.58,80.88 ; 157.6,80.9 157.58,80.88 ; usbc.A9 157.58,80.88
  Bottom Layer w0.6: v10(37.338,104.045) 44.955,104.045 45.1,103.9 49.2,108 66.7,108 71,112.3 PRG.6 ; v3(98.5,84.4) 100.03,84.4 BBA1.8
  Bottom Layer w0.7: TP4056.4 149.26,83.92 usbc.B9@159.7,83.92 ; usbc.A9 161.58,80.88 162.1,81.4 162.1,83.3 161.48,83.92 usbc.B9
GND: 1.2k.1@52.6,55.075 1.2k.1@65.2,56.175 1.6u.1 1k.1 1u.1 1uF.2 10k.1@102.125,87.2 10k.3 100n.2@73.8,56.05 150r.1 ADC1.2 ADC1.5 ADC1.10 ADC1.11 ADC1.12 bat.2 BBA1.4 CA1.1 CA2.1 CA3.1 CA4.1 CA5.1 CF8.2 CF9.2 CF10.2 CF11.2 CF12.2 chd1.2 chd2.2 CRG.2 dac1.4 dac1.7 DG1.2 enc1.1 enc1.COM enc1.S1 enc1.S2 IQ.1 J1.2@157,96.8 J1.3@154.1,91.9 lo1.8 P1.2 P1.10 P1.11 P1.12 P1.13 P1.14 pad.6 PAM8403.2 PAM8403.11 PAM8403.15 PRG.5 R8.1@151.4,85.225 R9.1@153.6,85.225 rf-tr1.2 rf-tr1.5 rf-tr2.4 rf-tr3.2 rf-tr3.4 rf-tr4.5 rf-tr5.2 rf-tr5.4 S1.1@57.25,50.85 S1.2@63.75,50.85 S2.1 S2.2 S3.1 S3.2 S?.1 S?.2 Sp1.1 Sp1.2 STDBY.2 TP4056.3 TP4056.9 U1.1 U2.2_4 UC1.1 UC1.15 UC1.32 UC1.38 UC1.39_1 UC1.39_2 UC1.39_3 UC1.39_4 UC1.39_5 UC1.39_6 UC1.39_7 UC1.39_8 UC1.39_9 UC1.39_10 UC1.39_11 UC1.39_12 UC1.39_13 UC1.39_14 UC1.39_15 UC1.39_16 UC1.39_17 UC1.39_18 UC1.39_19 UC1.39_20 UC1.39_21 usbc.A12 usbc.B12 usbc.S1 usbc.S2 usbc.S3 usbc.S4 Y2.2 Y2.4 | length 1.4
  Top Layer w0.3: UC1.39_5 UC1.39_16 ; ADC1.5 v5(91,95.75)
  other v1: 36,48 40,48 44,48 48,48 52,48 56,48 60,48 64,48 68,48 72,48 76,48 80,48 88,48 96,48 100,48 104,48 108,48 112,48 116,48 120,48 124,48 128,48 132,48 144,48 148,48 152,48 156,48 30,52 34,52 38,52 42,52 46,52 50,52 54,52 62,52 66,52 70,52 74,52 78,52 82,52 90,52 94,52 98,52 102,52 106,52 110,52 130,52 134,52 138,52 142,52 146,52 158,52 162,52 28,56 32,56 36,56 40,56 44,56 48,56 68,56 72,56 80,56 88,56 92,56 96,56 100,56 104,56 132,56 148,56 152,56 156,56 160,56 164,56 34,60 50,60 74,60 82,60 86,60 90,60 94,60 102,60 110,60 118,60 126,60 130,60 154,60 158,60 162,60 52,64 64,64 72,64 80,64 88,64 120,64 128,64 132,64 136,64 144,64 148,64 156,64 160,64 164,64 34,68 38,68 42,68 46,68 50,68 54,68 58,68 62,68 66,68 70,68 74,68 78,68 82,68 94,68 98,68 102,68 106,68 110,68 114,68 118,68 122,68 126,68 130,68 134,68 138,68 146,68 150,68 154,68 158,68 162,68 28,72 32,72 44,72 48,72 52,72 56,72 64,72 68,72 72,72 80,72 84,72 88,72 100,72 108,72 120,72 124,72 128,72 132,72 136,72 140,72 144,72 152,72 156,72 160,72 164,72 30,76 34,76 42,76 46,76 50,76 58,76 126,76 130,76 134,76 138,76 142,76 158,76 162,76 28,80 48,80 52,80 56,80 64,80 68,80 72,80 104,80 120,80 124,80 128,80 164,80 30,84 34,84 74,84 106,84 114,84 118,84 122,84 126,84 130,84 134,84 142,84 28,88 32,88 68,88 132,88 140,88 144,88 148,88 152,88 160,88 164,88 30,92 86,92 94,92 106,92 122,92 134,92 142,92 150,92 158,92 162,92 44,96 48,96 164,96 30,100 42,100 46,100 90,100 94,100 102,100 150,100 154,100 158,100 162,100 28,104 32,104 48,104 144,104 148,104 160,104 164,104 30,108 34,108 42,108 90,108 94,108 106,108 110,108 114,108 118,108 130,108 138,108 146,108 150,108 154,108 158,108 162,108 28,112 32,112 36,112 56,112 60,112 96,112 100,112 108,112 112,112 116,112 120,112 124,112 136,112 140,112 144,112 152,112 160,112 164,112 34,116 38,116 42,116 46,116 70,116 74,116 78,116 82,116 86,116 90,116 94,116 98,116 118,116 146,116 150,116 154,116 158,116
  other v2: 146.1,81.1 147.05,81.1 148,81.1 146.1,82.4 147.05,82.4 148,82.4
  other v4: 37.338,71.025 37.338,73.565 37.338,76.105 37.338,78.645 37.338,81.185 37.338,101.505
  other v7: 29.5,47.5 162.4,47.5 162.4,115.8 29.5,115.9
Net1.2k_1: 1.2k.1@52.6,62.275 1.2k.2@52.6,58.525 1.8n.2@49.35,63.6 QA1.1 | length 11
  Top Layer w0.6: 1.8n.2@49.35,63.6 49.8,63.6 51.125,62.275 1.2k.1@52.6,62.275 ; 1.2k.2@52.6,58.525 1.2k.1@52.6,62.275 ; QA1.1 54.275,60.6 1.2k.1@52.6,62.275
Net1.2k_1: 1.2k.1@65.2,62.275 1.2k.2@65.2,59.625 100n.2@62.15,62.3 QA2.1 | length 9
  Top Layer w0.6: 100n.2@62.15,62.3 62.175,62.275 1.2k.1@65.2,62.275 ; 1.2k.2@65.2,59.625 1.2k.1@65.2,62.275 ; QA2.1 66.475,61 1.2k.1@65.2,62.275
Net1.2k_2: 1.2k.2@65.2,65.725 100n.1@74,62.2 470r.1@68.575,66 QA2.3 | length 11.8
  Top Layer w0.6: 1.2k.2@65.2,65.725 65.475,66 68.575,66 68.575,63.725 QA2.3 70.1,62.2 100n.1@74,62.2
Net1.2k_2: 1.2k.2@52.6,65.725 100n.1@60.65,62.3 470r.1@55.975,66.6 QA1.3 | length 12.1
  Top Layer w0.6: 1.2k.2@52.6,65.725 53.475,66.6 55.975,66.6 56.35,66.225 QA1.3 57.05,62.3 100n.1@60.65,62.3
Net1.6u_2: 1.6u.2@39,61.285 1.8n.2@37.75,63.6 430p.1@40.116,63.6 | length 5.1
  Top Layer w0.6: 1.8n.2@37.75,63.6 40.116,63.6 39,62.484 1.6u.2@39,61.285
Net1.6u_2: 1.6u.2@46.7,61.285 1.8n.1@47.85,63.6 430p.2@45.483,63.6 | length 5.2
  Top Layer w0.6: 430p.2@45.483,63.6 47.85,63.6 46.7,62.45 1.6u.2@46.7,61.285
Net1.8n_1: 1.8n.1@36.25,63.6 pad.3 | length 7.5
  Top Layer w0.6: pad.3 1.8n.1@36.25,63.6
Net1k_2: 1k.2 TP4056.2 | length 6.4
  Bottom Layer w0.3: 1k.2 146.55,88.6 146.55,84.26 TP4056.2
Net1u_2: 1u.2 430p.1@43.983,63.6 430p.2@41.616,63.6 | length 5.2
  Top Layer w0.6: 430p.2@41.616,63.6 43.983,63.6 42.85,62.467 1u.2
Net5k_1: 5k.1@95.825,81.4 220n.1@95.05,84.3 BBA1.7 | length 10.3
  Bottom Layer w0.6: 220n.1@95.05,84.3 95.825,83.525 5k.1@95.825,82 ; 5k.1@95.825,81.4 5k.1@95.825,82 ; BBA1.7 99.935,80.735 98.67,82 5k.1@95.825,82
Net5k_1: 5k.1@116.525,81.7 100r.2@113.075,79.2 BBA1.2 | length 10.7
  Bottom Layer w0.6: BBA1.2 109.565,80.735 111.1,79.2 113.075,79.2 114.025,79.2 5k.1@116.425,81.6
Net5k_2: 5k.2@92.375,81.4 100r.1@95.725,78.7 BBA1.6 | length 11.5
  Bottom Layer w0.6: 5k.2@92.375,81.4 93.025,81.4 95.725,78.7 99.8,78.7 100.565,79.465 BBA1.6
Net5k_2: 5k.2@113.075,81.7 220n.1@110.25,83.9 BBA1.1 | length 7.4
  Bottom Layer w0.6: BBA1.1 108.921,82.005 109.95,83.034 110.009,83.034 110.875,83.9 5k.2@113.075,81.7
Net10k_1: 10k.1@102.025,84.4 10k.2@98.675,87.2 BBA1.3 BBA1.5 | length 17.2
  Bottom Layer w0.6: 10k.2@98.675,87.2 101.475,84.4 102.025,84.4 103,84.4 105.05,82.35 105.05,79.05 ; BBA1.5 104.195,78.195 105.05,79.05 ; BBA1.3 105.465,79.465 105.05,79.05
Net10k_1: 10k.1@147.5,111.4 dac1.6 dac1.8 J1.2@101.6,107.1 | length 58.1
  Top Layer w0.2: dac1.6 115.335,100.965 114.7,101.6 114.7,103.1 115.2,103.6 v2(138.5,103.6)
  Bottom Layer w0.2: v2(138.5,103.6) 146.1,111.2 147.3,111.2 10k.1@147.5,111.4
  Bottom Layer w0.6: J1.2@101.6,107.1 101.6,108.2 102.8,109.4 106.7,109.4 112.6,103.5 v5(116.1,103.5)
Net10k_2: 10k.2@147.5,108.9 PAM8403.7 PAM8403.10 | length 47.8
  Top Layer w0.3: PAM8403.7 PAM8403.10 129.86,88.66 v2(131.9,90.7)
  Bottom Layer w0.3: v2(131.9,90.7) 131.9,95.2 145.6,108.9 10k.2@147.5,108.9
Net100n_1: 100n.1@60.6,57.55 150r.2@56.9,58.725 QA1.2 | length 5.5
  Top Layer w0.6: QA1.2 57.3,58.925 58.225,58 100n.1@60.75,58
Net100n_1: 100n.1@73.8,57.55 150r.2@69.9,58.725 QA2.2 | length 6.7
  Top Layer w0.6: QA2.2 69.9,60.95 69.9,58.725 71.075,57.55 100n.1@73.8,57.55
Net100n_2: 100n.2@75.5,62.2 rf-tr1.4 | length 8.1
  Top Layer w0.6: 100n.2@75.5,62.2 78.6,65.3 rf-tr1.4
Net100r_1: 100r.1@116.525,79.2 220n.2@115.65,74.9 | length 4.7
  Bottom Layer w0.6: 220n.2@115.65,74.9 115.65,78.325 100r.1@116.525,79.2
Net100r_2: 100r.2@92.275,78.7 220n.2@93.45,74.8 | length 4.4
  Bottom Layer w0.6: 100r.2@92.275,78.7 93.45,77.525 220n.2@93.45,74.8
Net220n_1: 220n.1@114.15,74.9 rf-tr2.2 | length 8.7
  Bottom Layer w0.6: v3(106.2,73) 108.1,74.9 220n.1@114.15,74.9
Net220n_1: 220n.1@94.95,74.8 rf-tr4.2 | length 16.5
  Bottom Layer w0.6: 220n.1@94.95,74.8 94.95,73.05 105.1,62.9 v3(105.5,62.9)
Net220n_2: 220n.2@108.75,83.9 CAu2.2 IQ-in.2 IQ.2 J1.1@104.14,107.1 | length 116.1
  Top Layer w0.3: IQ-in.2@84.4,81.7 CAu2.2 ; IQ-in.2 85.7,80.6 89.2,80.6 99.3,90.7 100,90.7 102.4,93.1 102.4,98.054 103.346,99 108.6,99 v5(109.2,98.4) 110.3,97.3 120.1,97.3 121.3,98.5 124,98.5 124.6,99.1 133.3,99.1 v2(134.2,100)
  Bottom Layer w0.3: J1.1@104.14,107.1 104.14,106.86 109.2,101.8 v5(109.2,98.4) ; v2(134.2,100) 134.2,101.7 135.4,102.9 v8(135.4,107.7)
  Bottom Layer w0.6: IQ-in.2 91.5,88.6 102.9,88.6 107.6,83.9 220n.2@108.75,83.9
Net220n_2: 220n.2@93.55,84.3 CAu1.2 IQ-in.1 IQ.3 J1.3@99.06,107.1 | length 102.6
  Top Layer w0.3: IQ-in.1@87.1,81.4 IQ-in.1@87.27,81.57 ; IQ-in.1 IQ-in.1@87.4,81.7 ; CAu1.2 IQ-in.1@87.4,81.7 ; v2(131.9,100.1) 131.7,99.9 123.4,99.9 122.5,99 120.904,99 119.804,97.9 110.5,97.9 108.7,99.7 102.9,99.7 101.2,98 v5(101.2,97.9) 101.2,93.296 98.804,90.9 97.3,90.9 88.1,81.7 IQ-in.1@87.4,81.7
  Bottom Layer w0.3: J1.3@99.06,107.1 99.06,100.04 v5(101.2,97.9) ; v2(131.9,100.1) 133.4,101.6 133.4,110.6 137.4,114.6 142.3,114.6 v8(142.8,115.1)
  Bottom Layer w0.6: IQ-in.1 89.2,81.7 91.8,84.3 220n.2@93.55,84.3
NetADC1_1: ADC1.1 CA1.2 | length 3
  Top Layer w0.3: ADC1.1 90.47,90.18 CA1.2
NetADC1_6: ADC1.6 Sp1.3 Sp1.4 UC1.25 | length 99.1
  Top Layer w0.3: Sp1.3 32.75,77.75 32.75,83.85 Sp1.4 ; v2(64,103.3) 64,98.463 67.355,95.107 UC1.25
  Bottom Layer w0.3: Sp1.4@33.07,84.37 34.8,86.1 34.8,96.2 36.797,98.197 36.903,98.197 36.986,98.115 37.69,98.115 37.773,98.197 64.703,98.197 v8(67.8,95.1) ; v2(64,103.3) 64,103.8 64.8,104.6 87.1,104.6 87.9,103.8 87.9,97.4 88.9,96.4 v6(90.47,96.4)
NetADC1_7: ADC1.7 UC1.10 | length 42.4
  Top Layer w0.3: v3(86.1,100.8) 86.4,100.8 90.15,97.05 ADC1.7
  Bottom Layer w0.3: v2(51.035,100.187) 51.698,100.85 70.25,100.85 70.8,100.3 70.8,100.293 71.693,99.4 81.9,99.4 83.3,100.8 v3(86.1,100.8)
NetADC1_8: ADC1.8 UC1.11 | length 49.1
  Top Layer w0.3: v2@52.697,103.997 56,107.3 63.8,107.3 65.2,105.9 65.2,100.4 65.8,99.8 65.9,99.9 v2(65.9,99.8)
  Bottom Layer w0.3: v2@50.183,98.917 v2@50.265,99 ; v2(50.4,99) v2@50.265,99 ; v2(52.7,103.9) 50.8,103.9 49.2,102.3 49.2,99.9 50.1,99 v2@50.265,99 ; v2(65.9,99.8) 70.5,99.8 73.3,97 v6(84.5,97)
NetADC1_9: ADC1.9 UC1.28 | length 17.1
  Top Layer w0.2: UC1.28 v2(69.817,98.917)
  Bottom Layer w0.2: v2(69.817,98.917) 70.683,98.917 73.2,96.4 v5(84.1,96.4)
NetADC1_13: ADC1.13 CAu1.1 | length 5.7
  Top Layer w0.3: ADC1.13 86.3,93.8 87.4,92.7 CAu1.1
NetADC1_14: ADC1.14 CAu2.1 | length 4.8
  Top Layer w0.3: CAu2.1 83.1,91.45 83.1,92.6 83.65,93.15 ADC1.14
Netbat_1: bat.1 DB1.1 TP4056.5 | length 75.1
  Top Layer w0.6: DB1.1 117.05,104.3 138.79,104.3 140.49,102.6 143.97,102.6 145.27,101.3 155.238,101.3 160.8,95.738 160.8,92.9 152.7,84.8 bat.1 149.76,78.34 v2(148.9,79.2)
NetCF8_1: CF8.1 PAM8403.8 | length 2.5
  Top Layer w0.3: CF8.1 108.26,87.39 PAM8403.8
NetCF11_1: CF11.1@125.6,93.55 LSP1.2 SP1.1 | length 5.3
  Top Layer w0.6: LSP1.2 128.76,93.9 SP1.1
NetCF12_1: CF12.1 LSP2.2 SP1.2 | length 5.2
  Top Layer w0.6: LSP2.2 SP1.2@128.9,96.3
Netchd1_1: chd1.1 Lhd1.2 Rhd1.1 Rhd2.1 | length 35.8
  Top Layer w0.2: chd1.1 104.25,96.3 v2(106.1,96.3) Lhd1.2
  Bottom Layer w0.3: v2(106.1,96.3) 120.525,96.3 Rhd2.1 131.725,107.7 Rhd1.1
Netchd2_1: chd2.1 headphones.1 Lhd2.2 | length 55.3
  Top Layer w0.2: chd2.1 104.15,93.5 Lhd2.2
  Bottom Layer w0.2: v2(106.2,93.6) 120.3,93.6 132.9,106.2 132.9,113.1 128.7,117.3 v2(120.5,117.3)
NetCLO1_1: CLO1.1 lo1.10 | length 4.6
  Top Layer w0.3: lo1.10 74.591,77.591 75.6,78.6 CLO1.1@77.6,78.6
NetCLO1_2: CLO1.2 rf-tr3.5 | length 46.7
  Top Layer w0.6: CLO1.2 81.9,76.75 117.65,76.75 122.4,72 rf-tr3.5
NetCLO2_1: CLO2.1 lo1.9 | length 4.6
  Top Layer w0.3: lo1.9 74.592,77.108 75.5,76.2 CLO2.1 CLO2.1@77.65,76.2
NetCLO2_2: CLO2.2 rf-tr5.5 | length 56.4
  Top Layer w0.6: CLO2.2 82.35,73.8 84.3,73.8 86.3,71.8 86.3,62.2 90.5,58 119.9,58 rf-tr5.5
NetCRG_1: CRG.1 R8.1@146.2,72.575 | length 25.3
  Top Layer w0.6: CRG.1 136,62.275 R8.1@146.3,72.575
Netdac1_1: dac1.1 UC1.16 | length 59.9
  Top Layer w0.3: UC1.16 55.09,95.09 62,102 v3(62.4,102)
  Top Layer w0.35: v3(86.6,103.9) 109.905,103.9 dac1.1@110.2,103.605
  Bottom Layer w0.3: v3@62.4,101.9 62.507,102.007 81.317,102.007 83.21,103.9 v3(86.6,103.9)
Netdac1_2: dac1.2 UC1.14 | length 65.8
  Top Layer w0.35: UC1.14 52.107,95.107 53.4,96.4 v2(53.4,101.4) ; v3(87.1,102.635) 110.365,102.635 dac1.2@110.7,102.3
  Bottom Layer w0.35: v2@53.5,101.375 70.375,101.375 70.5,101.5 72.3,101.5 72.382,101.582 81.494,101.582 82.546,102.635 v3(87.1,102.635)
Netdac1_3: dac1.3 UC1.29 | length 43.6
  Top Layer w0.3: UC1.29 71.287,100.187 v3(71.5,100.4)
  Top Layer w0.35: v3@86.6,101.785 89.354,101.785 90.174,100.965 dac1.3
  Bottom Layer w0.3: v3(71.5,100.4) 81.012,100.5 82.312,101.8 v3(86.6,101.8)
NetDB1_2: DB1.2 S1.3@105.9,116.5 | length 11.9
  Top Layer w0.6: S1.3@105.9,116.5 112.55,109.85 DB1.2
Netenc1_2: enc1.2 UC1.8 | length 136
  Top Layer w0.2: UC1.8 53.373,102.727 54.5,101.6 v2(54.5,100.1)
  Bottom Layer w0.2: v2(54.5,100.1) 64.4,100.1 66.3,98.2 70.6,98.2 75.1,93.7 75.1,91 83.65,82.45 83.65,81.306 107.532,57.425 130.125,57.425 135.3,62.6 146.8,62.6 155,54.4 enc1.2
Netenc1_A: enc1.A UC1.9 | length 126.7
  Top Layer w0.2: v2(51.035,101.457) 49.357,101.457 46.9,99 46.9,92.9 48.3,91.5 62.4,91.5 v2@62.5,91.6 ; v2(70.6,91.8) v2(73.7,91.8)
  Bottom Layer w0.2: v2(62.5,91.5) 70.3,91.5 v2(70.6,91.8) ; v2(73.7,91.8) 73.7,90.832 108.132,56.4 130.8,56.4 133.8,59.4 enc1.A
Netenc1_B: enc1.B UC1.12 | length 115.9
  Top Layer w0.2: v2(68.5,93.3) 72.9,93.3 v2(73,93.2)
  Bottom Layer w0.2: v2(51.035,97.647) 55.653,97.647 60,93.3 v2(68.5,93.3) ; v2(73,93.2) 73,90.722 111.885,51.837 120.059,51.837 120.497,51.4 127.3,51.4 130.3,54.4 enc1.B
Netheadphones_2: headphones.2 Rhd2.2 | length 7.7
  Bottom Layer w0.2: v2(120.7,107.6) Rhd2.2
Netheadphones_3: headphones.3 Rhd1.2 | length 4.3
  Bottom Layer w0.2: v2(127.7,114.8) 128.275,114.225 Rhd1.2
NetLG1_2: LG1.2 RD1.1@79.15,94.6 | length 50.4
  Top Layer w0.6: v5(64.5,82.6) 73.9,82.6 79.4,88.1 79.4,94.35 RD1.1@79.15,94.6
  Bottom Layer w0.6: v5(62.7,60.085) 60.4,62.385 60.4,80.9 62.1,82.6 v5(64.5,82.6)
NetLhd1_1: Lhd1.1 PAM8403.1 | length 2.8
  Top Layer w0.2: Lhd1.1 107.92,96.28 PAM8403.1
NetLhd2_1: Lhd2.1 PAM8403.3 | length 2.9
  Top Layer w0.2: Lhd2.1 108.125,93.74 PAM8403.3
Netlo1_2: lo1.2 Y2.1 | length 6.5
  Top Layer w0.3: Y2.1@63,77.8 63.9,76.9 65.8,76.9 66.008,77.108 lo1.2
Netlo1_3: lo1.3 Y2.3 | length 4.7
  Top Layer w0.3: Y2.3@64.75,75.5 65.2,75.5 66.3,76.6 lo1.3
Netlo1_4: lo1.4 UC1.36 | length 54.9
  Top Layer w0.2: v6(67.5,76.2) 67.608,76.092 lo1.4 ; UC1.36 68.258,109.3 75,109.3 80.8,103.5 80.8,86.1 75.5,80.8 v6(69.1,80.8)
  Bottom Layer w0.2: v6(67.5,76.2) 66.9,76.8 66.9,80.267 67.433,80.8 v6(69.1,80.8)
Netlo1_5: lo1.5 UC1.33 | length 49
  Top Layer w0.2: v2(68.035,105.267) 73.033,105.267 80.1,98.2 80.1,87.1 74.5,81.5 v6(69.1,81.5)
  Bottom Layer w0.2: v6(68.5,75.6) 67.3,75.6 66.4,76.5 66.4,80.5 67.4,81.5 v6(69.1,81.5)
NetLSP1_1: LSP1.1 PAM8403.14 | length 5.9
  Top Layer w0.6: PAM8403.14 121.755,93.74 LSP1.1
NetLSP2_1: LSP2.1 PAM8403.16 | length 5.8
  Top Layer w0.6: PAM8403.16 116.12,96.3 LSP2.1
NetP1_3: P1.3 UC1.23 | length 36.8
  Top Layer w0.4: v4(37.338,98.965) 38.135,98.965 49.2,87.9 62.9,87.9 63.98,88.98 UC1.23
NetP1_5: P1.5 UC1.24 | length 36.3
  Top Layer w0.4: v4(37.338,93.885) 41.415,93.885 47.9,87.4 63.6,87.4 65.25,89.05 UC1.24
  other v2: 37.4,93.6
NetP1_6: P1.6 UC1.37 | length 78
  Top Layer w0.4: v4(37.338,91.345) 41.055,91.345 46,86.4 69.4,86.4 75,92 v9(75.9,92)
  Top Layer w0.6: UC1.37 76.453,110.347 81.9,104.9 v2(81.9,92)
  Bottom Layer w0.6: v9(75.9,92) v2(81.9,92)
NetP1_7: P1.7 UC1.30 | length 59.9
  Top Layer w0.6: v4(37.338,88.805) 40.895,88.805 44,85.7 72.3,85.7 77.1,90.5 77.1,96.1 71.743,101.457 UC1.30
  other v2: 37.5,89
NetP1_9: P1.9 UC1.31 | length 62.7
  Top Layer w0.6: v4(37.338,83.725) 37.563,83.5 71.9,83.5 77.9,89.5 77.9,96.7 71.873,102.727 v2(68.035,102.727)
NetPRG_2: PRG.2 R1.1 S?.3 S?.4 UC1.3 | length 84
  Top Layer w0.3: S?.3 S?.4 ; R1.1 47.075,106.875 49.277,109.077 v2(51.035,109.077) 58.177,109.077 61.5,112.4 74.8,112.4 76.3,113.9 89.3,113.9 PRG.2
  Bottom Layer w0.3: S?.4 30.8,98.2 30.8,100.8 39.077,109.077 v2(51.035,109.077)
NetPRG_3: PRG.3 UC1.35 | length 22.2
  Bottom Layer w0.6: v2(68.035,107.807) 83.868,107.807 PRG.3
NetPRG_4: PRG.4 UC1.34 | length 20.2
  Top Layer w0.6: UC1.34 71.637,106.537 v2(73.7,108.6)
  Bottom Layer w0.6: v2(73.7,108.6) 82.12,108.6 PRG.4
NetR8_2: R8.2@146.2,76.025 TP4056.7 | length 3.3
  Top Layer w0.3: R8.2@146.3,76.025 146.4,76.125 v2(146.4,79.3)
NetR8_2: R8.2@151.4,81.775 usbc.A5 | length 11.8
  Bottom Layer w0.3: R8.2@151.4,81.775 151.4,80.1 152,79.5 154.1,79.5 157.5,82.9 usbc.A5
NetR9_1: R9.1@149,72.575 STDBY.1 | length 24.8
  Top Layer w0.6: STDBY.1 140,63.575 R9.1@149,72.575
NetR9_2: R9.2@149,76.025 TP4056.6 | length 3.7
  Top Layer w0.3: v2(147.7,79.2) 147.7,77.325 R9.2@149,76.025
NetR9_2: R9.2@153.6,81.775 usbc.B5 | length 6.4
  Top Layer w0.4: v2(153.6,81.775) 159.775,81.775 v2(159.9,81.9)
NetRD1_1: RD1.1@94.5,69.525 rf-tr1.1 rf-tr2.5 | length 11.6
  Top Layer w0.6: rf-tr1.1 92.7,70.3 93.3,70.9 ; RD1.1@94.5,69.525 93.3,70.725 93.3,70.9 ; rf-tr2.5 93.3,70.9
NetRD1_2: RD1.2@75.7,94.6 UC1.26 | length 8.4
  Top Layer w0.6: UC1.26 72.122,96.377 73.9,94.6 RD1.2@75.7,94.6
NetRD1_2: RD1.2@94.5,66.075 rf-tr1.3 rf-tr4.4 | length 11.4
  Top Layer w0.6: rf-tr1.3 93,65.3 93.4,64.9 ; RD1.2@94.5,66.075 93.4,64.975 93.4,64.9 ; rf-tr4.4 93.4,64.9
Netrf-tr2_1: rf-tr2.1 Ring1.1 | length 4.2
  Top Layer w0.6: rf-tr2.1 107.7,75.5 Ring1.1
Netrf-tr2_3: rf-tr2.3 Ring1.2 | length 4.1
  Top Layer w0.6: rf-tr2.3 107.9,70.5 Ring1.2
Netrf-tr3_1: rf-tr3.1 Ring1.3 | length 3.6
  Top Layer w0.6: Ring1.3 112.9,70.5 rf-tr3.1
Netrf-tr3_3: rf-tr3.3 Ring1.4 | length 3.6
  Top Layer w0.6: Ring1.4 112.9,75.5 rf-tr3.3
Netrf-tr4_1: rf-tr4.1 Ring2.1 | length 4
  Top Layer w0.6: rf-tr4.1 107.5,65.3 Ring2.1
Netrf-tr4_3: rf-tr4.3 Ring2.2 | length 3.9
  Top Layer w0.6: rf-tr4.3 107.9,60.3 Ring2.2
Netrf-tr5_1: rf-tr5.1 Ring2.3 | length 3.5
  Top Layer w0.6: Ring2.3 112.7,60.3 rf-tr5.1
Netrf-tr5_3: rf-tr5.3 Ring2.4 | length 3.6
  Top Layer w0.6: Ring2.4 112.9,65.3 rf-tr5.3
NetS1_3: S1.3@57.25,46.35 S1.4 UC1.13 | length 64.7
  Top Layer w0.2: S1.3@57.25,46.35 S1.4
  Bottom Layer w0.2: v2(51.035,96.377) 49.877,96.377 47.6,94.1 47.6,89.5 55.1,82 55.1,75.707 59.7,71.107 59.7,70.693 59.2,70.193 59.2,48.3 S1.3@57.25,46.35
NetS2_3: S2.3 S2.4 UC1.27 | length 65.8
  Top Layer w0.2: S2.3 S2.4
  Bottom Layer w0.2: v2(68.035,97.647) 69.553,97.647 72,95.2 72,89.1 76,85.1 76,55.55 S2.3
NetS3_3: S3.3 S3.4 UC1.20 | length 98.6
  Top Layer w0.2: UC1.20@60.5,94.437 UC1.20 60.17,95.43 60.34,95.6 66.2,95.6 66.596,95.204 66.596,94.504 66.808,94.292 72.392,94.292 v2(72.5,94.4) ; S3.3 S3.4
  Bottom Layer w0.2: v2(72.5,94.4) 72.5,89.024 76.3,85.224 76.3,62.7 91.663,47.337 92.109,47.337 92.688,46.759 92.688,46.712 93.05,46.35 S3.3
NetUC1_6: UC1.6
NetUC1_19: UC1.19
VCC: J1.1@151,96.8 U2.1 | length 5.8
  Top Layer w1: U2.1 147.58,96.8 J1.1@151,96.8
pads on no net: 10k.S1 10k.S2 100n.2@60.6,56.05 DG1.1 headphones. IQ. LG1.1 lo1.6 PAM8403.5 PAM8403.9 PAM8403.12 PRG.1 S1.1@111.9,116.5 S1.SH1 S1.SH2 TP4056.1 UC1.4 UC1.5 UC1.7 UC1.17 UC1.18 UC1.21 UC1.22
copper on no net: | length 5.8
  Top Layer w0.6: 60.7,53.7 60.7,56.15 ; 60.7,55.8 62.7,57.8 62.7,58.3

## Polygon pours and split planes (outlines as drawn)
GND on Bottom Layer "GND-BOTTOM" (solid, pour order 3): 26.1,44.2 166.1,44.2 166.1,119.3 26.1,119.3
GND on Top Layer "GNDTOP" (solid, pour order 2): 26.1,44.2 166.1,44.2 166.1,119.3 26.1,119.3

## Silkscreen, mask and mechanical layers (free items; w line width, h text height)
Mechanical 1:
  the board outline again, w1.2

## Dimensions
166.1,119.3 to 166.1,44.2 on Top Layer
26.1,119.3 to 166.1,119.3 on Top Layer

## Text inside footprints (layer, text, board x,y; h text height)
UC1: Mechanical 13 "ANTENNA" at 53.535,115.357 h1.78